# Altium PCB WEATHER_PCB.PcbDoc
Units mil, origin at the board's own origin, x right, y up, seen from the top; angles counter-clockwise.
Board outline 2746 x 1462 mil, 2 copper layers (Top Layer, Bottom Layer); 57 components, 56 nets, 190 pads, 31 vias.
Unrouted connection lines stored in the file: 12.
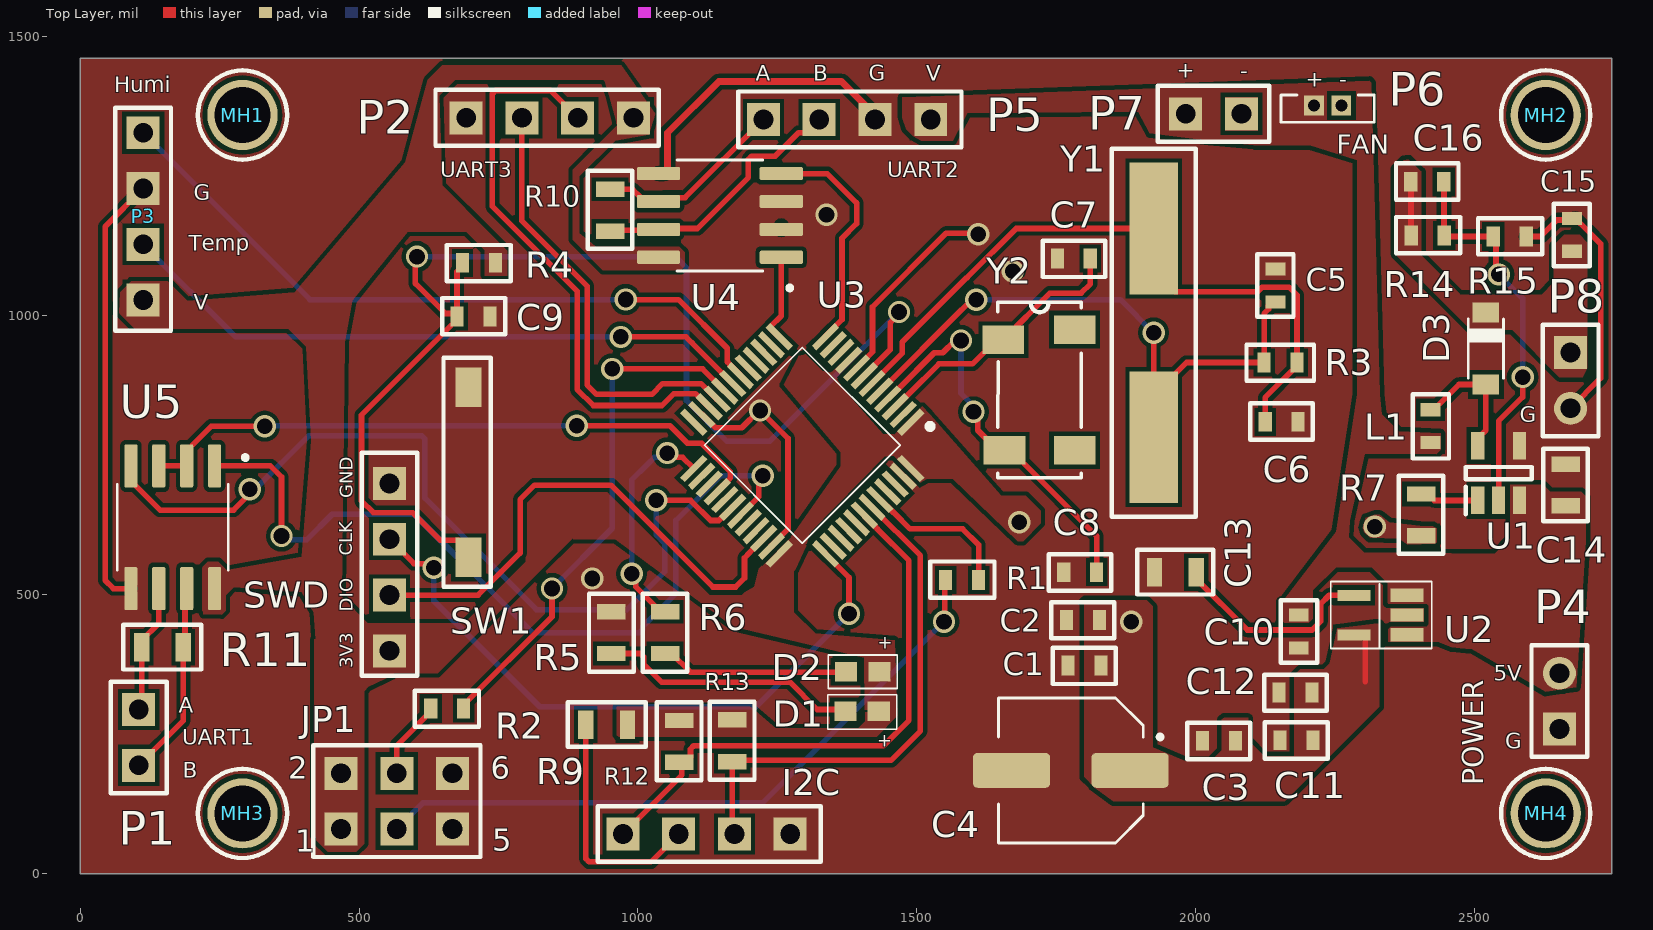
[diagram p0: Top Layer view]
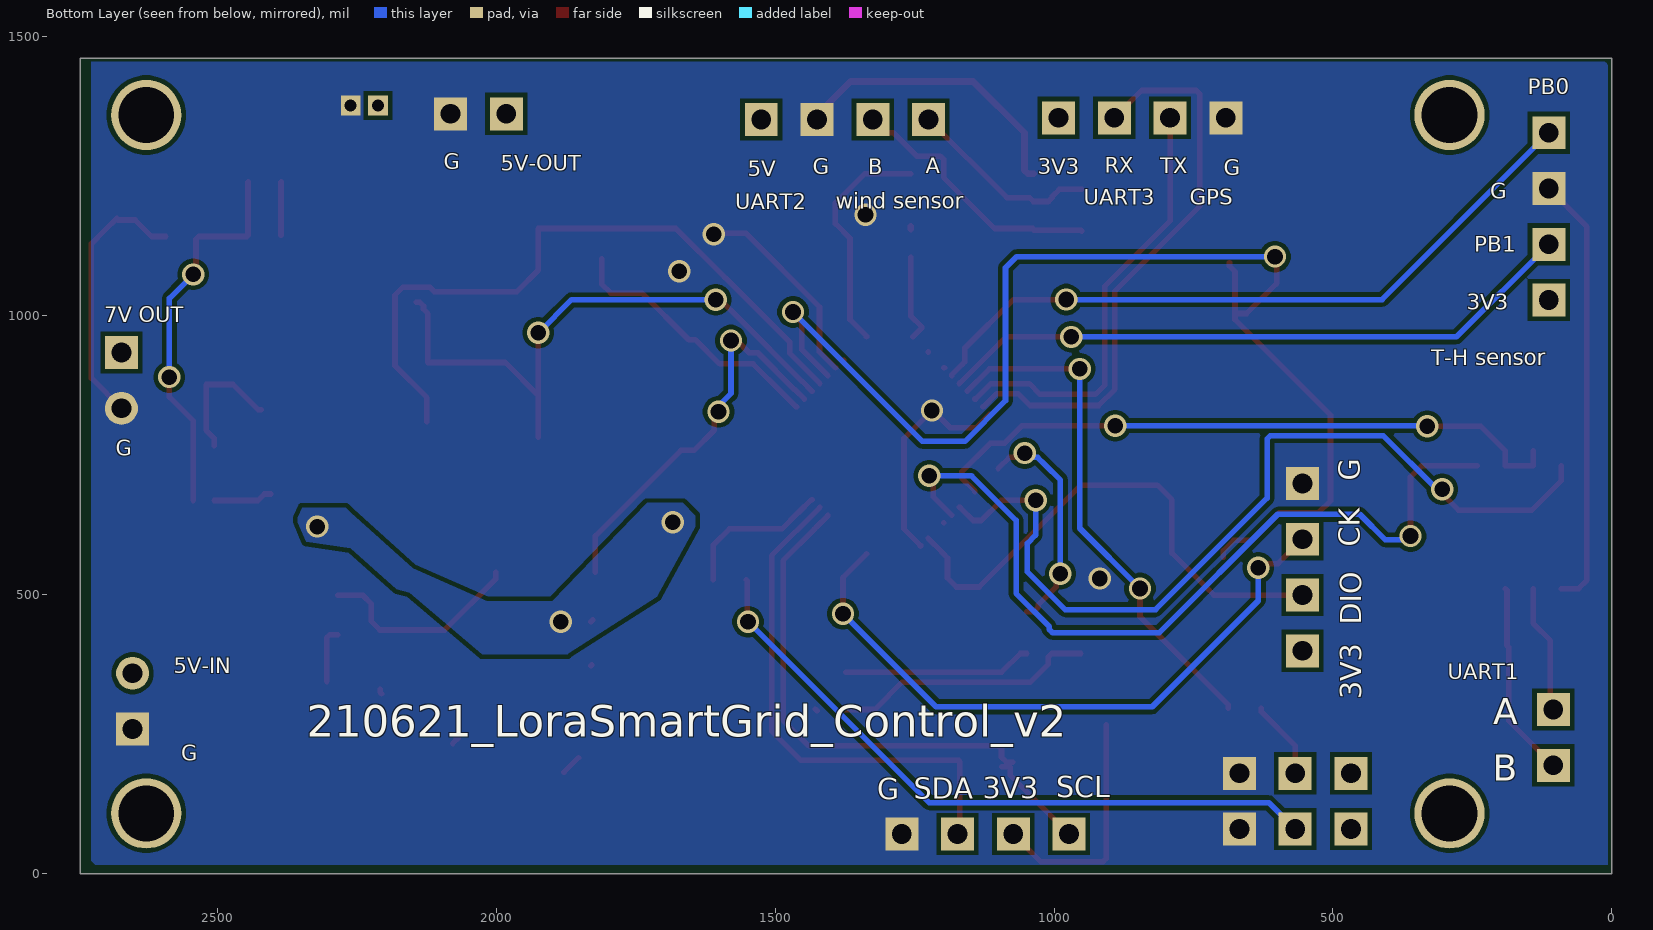
[diagram p1: Bottom Layer view, seen from below]
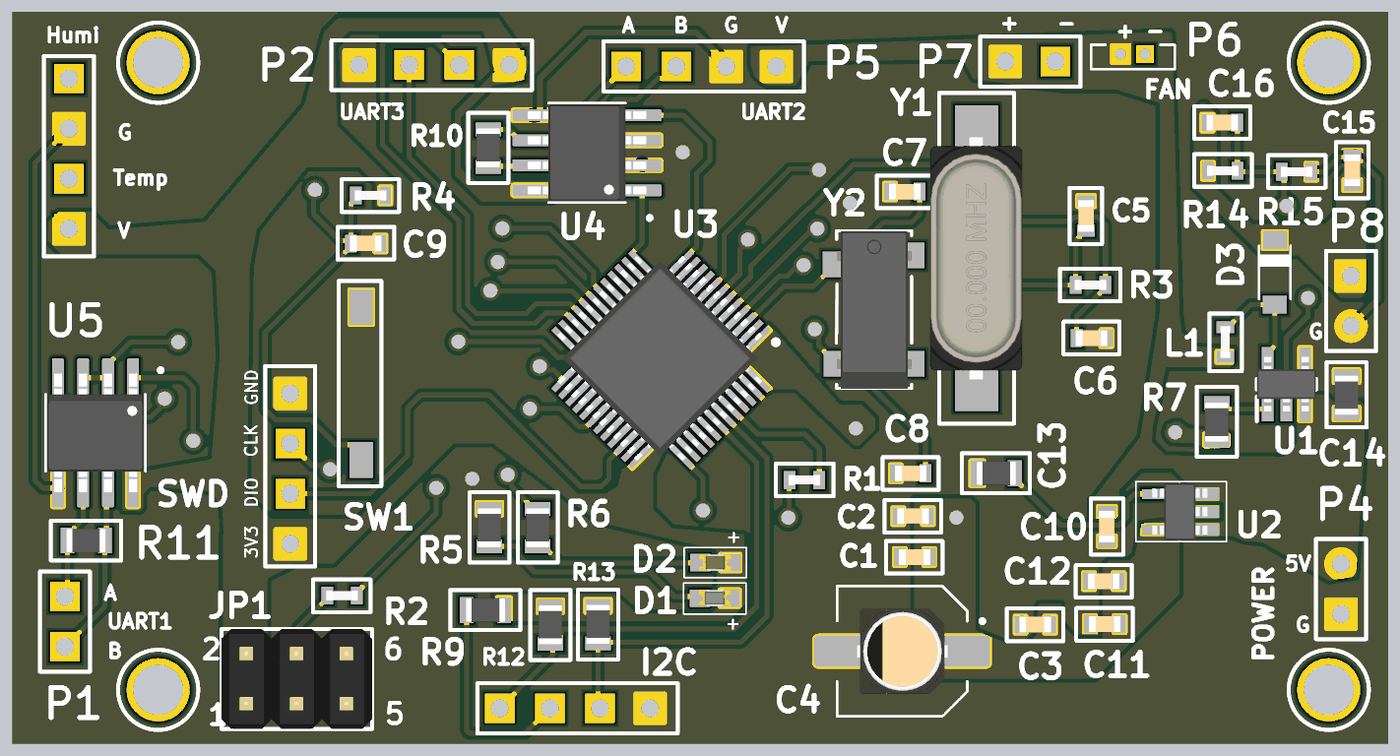
[diagram p2: 3D render of the assembled board from above, using the file's embedded part models]

## Layer stack, top to bottom
Top Solder: solder mask 0.4, Solder Resist, Dk 3.5
Top Layer: signal copper 1.4
Dielectric 1: dielectric 12.6, FR-4, Dk 4.8
Bottom Layer: signal copper 1.4
Bottom Solder: solder mask 0.4, Solder Resist, Dk 3.5

## Board outline
0.02,1461.78 2746.02,1461.78 2746.02,-0.22 0.02,-0.22

## Design rules (kind name [scope] priority, off if disabled: settings)
Clearance [All] p1: gap=7.87 ignorepadtopadclearanceinfootprint=FALSE
DiffPairsRouting [All] p1: maxlimit=10 minlimit=10 mostfreqgap=10 toplayer_minwidth=10 toplayer_maxwidth=15 toplayer_prefwidth=15 bottomlayer_minwidth=10 bottomlayer_maxwidth=15 bottomlayer_prefwidth=15 maxuncoupledlength=500
MinimumSolderMaskSliver [All] p1: minsoldermaskwidth=3.94
PlaneConnect [All] p1: planeconnectstyle=Direct reliefexpansion=20 reliefentries=4 reliefconductorwidth=10 reliefairgap=10
PolygonConnect [All] p1: connectstyle=Direct reliefconductorwidth=10 reliefentries=4 polygonreliefangle="90 Angle" airgapwidth=10
RoutingVias [All] p1: holewidth=28 width=50 viastyle="Through Hole" minholewidth=28 minwidth=50 maxholewidth=28 maxwidth=50
SilkToSolderMaskClearance [IsPad] p1: minsilkscreentomaskgap=3.94 clearancetoexposedcopper=TRUE
SolderMaskExpansion [All] p1: expansion=4 istentingtop=FALSE
Width [All] p1: maxlimit=13.78 minlimit=9.84 preferedwidth=11.81
26 further rules are at their usual default settings.

## Classes and differential pairs
differential pair RS485_2: +RS485_2_P -RS485_2_N
differential pair RS485_1: +RS485_1_P -RS485_1_N

## Components (designator, comment, footprint, x,y, rotation, side; value= is the part's Value field where it differs from the comment)
C1 "cap, 0.1u 0603" CAP0.1U_0603_CERAMIC 1800.68,372.84 r0 top
C2 "cap, 0.1u 0603" CAP0.1U_0603_CERAMIC 1797.73,454.54 r0 top
C3 "cap, 0.1u 0603" CAP0.1U_0603_CERAMIC 2041.83,238 r0 top
C4 "cap 0.1u EC" CAP0.1U_D55_EC 1776.08,184.85 r180 top
C5 "cap 22p 0603 ceramic" CAP22P_0603_CERAMIC 2143.2,1053.94 r270 top
C6 "cap 22p 0603 ceramic" CAP22P_0603_CERAMIC 2154.03,809.85 r180 top
C7 "cap 22p 0603 ceramic" CAP22P_0603_CERAMIC 1781.47,1102.49 r0 top
C8 "cap 22p 0603 ceramic" CAP22P_0603_CERAMIC 1792.81,540.17 r0 top
C9 "cap, 0.1u 0603" CAP0.1U_0603_CERAMIC 705.21,998.83 r180 top
C10 "1u, 0603, ceramic" CAP1U_0603_CERAMIC 2184.54,433.87 r90 top
C11 "cap, 0.1u 0603" CAP0.1U_0603_CERAMIC 2180.61,238.98 r0 top
C12 "1u, 0603, ceramic" CAP1U_0603_CERAMIC 2178.64,324.61 r0 top
C13 "cap 22nF, 0603" CAP22N_0603_CERAMIC 1964.07,540.17 r0 top
C14 "10u 0805 ceramic" CAP10u_0805_ceramic 2663,696 r270 top
C15 "4.7u, 0603, ceramic" CAP4.7u_0603_ceramic 2674.5,1145 r270 top
C16 "cap 12p 0603 ceramic" CAP12p_0603_ceramic 2415,1240 r180 top
D1 "led 0603 blue" LED0603_BLUE 1402.02,290.78 r180 top
D2 "LED" LED0603_GREEN 1403.02,361.78 r180 top
D3 "MBR0520LT1G" SOD3716X135N 2520,941 r270 top
I2C "I2C" HEADER4X1 1273.02,70.78 r180 top
JP1 "3x2" HDR3X2 567.78,129.64 r0 top
L1 "inductor 8.2u 0603" IND8.2u_0603 2421,802 r90 top
MH1 "NC" MH_2.2MMD_NC#1 291.02,1359.78 r0 top
MH2 "NC" MH_2.2MMD_NC#2 2627.46,1359.78 r0 top
MH3 "NC" MH_2.2MMD_NC#3 291.02,107.78 r90 top
MH4 "NC" MH_2.2MMD_NC#4 2627.46,107.78 r0 top
P1 "2x1 2.54mm" HEADER2X1 105,294 r270 top
P2 "HEADER4X1" HEADER4X1 1525,1352 r180 top
P3 "HEADER4X1" HEADER4X1 113,1028 r90 top
P4 "Header 2" HDR1X2#1 2652,259 r90 top
P5 "HEADER4X1" HEADER4X1 692.02,1354.78 r0 top
P6 "Header2x1_1.25" HEADER2X1_1.25 2211.98,1377 r180 top
P7 "Header 2" HDR1X2#2 2082,1362 r180 top
P8 "Header 2" HDR1X2#1 2672,934 r270 top
R1 "R 10k 0603" RES10K_0603 1581.2,526.39 r180 top
R2 "R 10k 0603" RES10K_0603 658,296 r0 top
R3 "resistor 10M 0603" RES10M_0603 2152.06,916.15 r0 top
R4 "R 10k 0603" RES10K_0603 715.02,1094.78 r0 top
R5 "Resistor 1k 0805" RES1K_0805 952.26,431.9 r270 top
R6 "Resistor 1k 0805" RES1K_0805 1048.72,431.9 r270 top
R7 "resistor 0R" RES_0R_0805 2404,643 r270 top
R9 "resistor 0R" RES_0R_0805 944,267 r0 top
R10 "120" RES120_0805 950.02,1189.78 r90 top
R11 "120" RES120_0805 147.02,405.78 r180 top
R12 "resistor 4.7K" RES_0R_0805 1074,237 r90 top
R13 "resistor 4.7K" RES_0R_0805 1169,238 r90 top
R14 "resistor 750K" RES750K_0603 2416,1144 r180 top
R15 "resistor 150K" RES150K_0603 2563,1142 r180 top
SW1 "NW3-A06-B3, push, tact" SW_TACT1 696.35,719.3 r90 top
SWD "SWD" HEADER4X1 554.62,699.22 r270 top
U1 "NCP1406SNT1G" SOT95P275X110-5N 2543,718 r90 top
U2 "regulator" RT9193-33 2331.2,463.39 r90 top
U3 "stm32f103c8t6" QFP50P900X900X160-48N 1294.78,767.53 r225 top
U4 "rs485 transciver SN65HVD12DR" RS485_Transciver_SN65HVD12DR 1147.02,1179.78 r180 top
U5 "rs485 transciver SN65HVD12DR" RS485_Transciver_SN65HVD12DR 166.02,620.78 r270 top
Y1 "XTAL 8M" XTAL_SMD_8M 1924.7,969.3 r90 top
Y2 "XTAL 32.768K, SMD" XTAL32.768K 1719.98,866.94 r270 top

## Footprints (in the part's own frame and the unit in brackets; to place one, negate y for a bottom-side part, rotate by r counter-clockwise, add the part's x,y. Pads: shape width x height; smd on the part's side, far side on the other; paste and mask are expansions set on the pad)
CAP0.1U_0603_CERAMIC [mm]
  rect 0.6x0.9 smd: 1(-0.75,0) 2(0.75,0)
  silkscreen extent -1.45,-0.84 1.42,0.81, body extent -0.8,-0.4 0.8,0.4, height 0.8
CAP0.1U_D55_EC [mm]
  rrect25% 3.51x1.58 smd: 1(-2.7,0) 2(2.7,0)
  silkscreen extent -4.16,-3.3 3.3,3.3, body extent -2.31,-2.14 2.29,2.16, height 5.63
CAP1U_0603_CERAMIC [mm]
  rect 0.6x0.9 smd: 1(-0.75,0) 2(0.75,0)
  silkscreen extent -1.42,-0.84 1.42,0.81, body extent -0.8,-0.4 0.8,0.4, height 0.8
CAP4.7u_0603_ceramic [mm]
  rect 0.6x0.9 smd: 1(-0.75,0) 2(0.75,0)
  silkscreen extent -1.42,-0.84 1.42,0.81, body extent -0.8,-0.4 0.8,0.4, height 0.8
CAP10u_0805_ceramic [mm]
  rect 0.7x1.3 smd: 1(-0.966,0) 2(0.934,0)
  silkscreen extent -1.67,-1.02 1.63,1.02, body extent -1,-0.6 1,0.6, height 0.71
CAP12p_0603_ceramic [mm]
  rect 0.6x0.9 smd: 1(-0.75,0) 2(0.75,0)
  silkscreen extent -1.42,-0.84 1.42,0.81, body extent -0.8,-0.4 0.8,0.4, height 0.8
CAP22N_0603_CERAMIC [mm]
  rect 0.7x1.3 smd: 1(-0.966,0) 2(0.934,0)
  silkscreen extent -1.75,-1.02 1.7,1.02, body extent -1,-0.6 1,0.6, height 0.71
CAP22P_0603_CERAMIC [mm]
  rect 0.6x0.9 smd: 1(-0.75,0) 2(0.75,0)
  silkscreen extent -1.42,-0.84 1.42,0.81, body extent -0.8,-0.4 0.8,0.4, height 0.8
HDR1X2#1 [mm] "Connector; Header; 2 Position"
  rect 1.5x1.5 hole 0.9: 1(0,0)
  round 1.5 hole 0.9: 2(2.54,0)
  silkscreen extent -1.27,-1.27 3.81,1.27
HDR1X2#2 [mm] "Connector; Header; 2 Position"
  rect 1.5x1.5 hole 0.9: 1(0,0) 2(2.54,0)
  silkscreen extent -1.27,-1.27 3.81,1.27
HDR3X2 [mm]
  rect 1.5x1.5 hole 0.9: 1(-2.54,-1.27) 2(-2.54,1.27) 3(0,-1.27) 4(0,1.27) 5(2.54,-1.27) 6(2.54,1.27)
  silkscreen extent -3.81,-2.54 3.81,2.54, body extent -3.81,-2.54 3.81,2.54, height 9.2
HEADER2X1 [mm]
  rect 1.5x1.5 hole 0.9: 1(0,0) 2(2.54,0)
  silkscreen extent -1.27,-1.27 3.81,1.27
HEADER2X1_1.25 [mm]
  rect 0.9x0.9 hole 0.55: 1(0,0) 2(-1.245,0)
  silkscreen extent -2.75,-0.47 1.5,0.76
HEADER4X1 [mm]
  rect 1.5x1.5 hole 0.9: 1(0,0) 2(2.54,0) 3(5.08,0) 4(7.62,0)
  silkscreen extent -1.4,-1.27 8.76,1.27
IND8.2u_0603 [mm]
  rect 0.6x0.9 smd: 1(-0.75,0) 2(0.75,0)
  silkscreen extent -1.47,-0.84 1.45,0.81, body extent -0.8,-0.26 0.8,0.25, height 0.43
LED0603_BLUE [mil]
  rect 40x35 smd: A(-29.92,0) K(29.92,0)
  silkscreen extent -62,-30 62,32, body extent -31,-16 31,16, height 24
LED0603_GREEN [mil]
  rect 40x35 smd: A(-29.92,0) K(29.92,0)
  silkscreen extent -62,-30 62,30, body extent -31,-16 31,16, height 24
MH_2.2MMD_NC#1 [mm]
  round 3.2 hole 2.54 unplated: 1(0,0)
  silkscreen extent -2.03,-2.03 2.03,2.03
MH_2.2MMD_NC#2 [mm]
  round 3.2 hole 2.54 unplated: 2(0,0)
  silkscreen extent -2.03,-2.03 2.03,2.03
MH_2.2MMD_NC#3 [mm]
  round 3.2 hole 2.54 unplated: 3(0,0)
  silkscreen extent -2.03,-2.03 2.03,2.03
MH_2.2MMD_NC#4 [mm]
  round 3.2 hole 2.54 unplated: 4(0,0)
  silkscreen extent -2.03,-2.03 2.03,2.03
QFP50P900X900X160-48N [mm]
  rect 1.475x0.3 smd: 1(-4.238,2.75) 2(-4.238,2.25) 3(-4.238,1.75) 4(-4.238,1.25) 5(-4.238,0.75) 6(-4.238,0.25) 7(-4.238,-0.25) 8(-4.238,-0.75) 9(-4.238,-1.25) 10(-4.238,-1.75) 11(-4.238,-2.25) 12(-4.238,-2.75) 25(4.238,-2.75) 26(4.238,-2.25) 27(4.238,-1.75) 28(4.238,-1.25) 29(4.238,-0.75) 30(4.238,-0.25) 31(4.238,0.25) 32(4.238,0.75) 33(4.238,1.25) 34(4.238,1.75) 35(4.238,2.25) 36(4.238,2.75)
  rect 0.3x1.475 smd: 13(-2.75,-4.238) 14(-2.25,-4.238) 15(-1.75,-4.238) 16(-1.25,-4.238) 17(-0.75,-4.238) 18(-0.25,-4.238) 19(0.25,-4.238) 20(0.75,-4.238) 21(1.25,-4.238) 22(1.75,-4.238) 23(2.25,-4.238) 24(2.75,-4.238) 37(2.75,4.238) 38(2.25,4.238) 39(1.75,4.238) 40(1.25,4.238) 41(0.75,4.238) 42(0.25,4.238) 43(-0.25,4.238) 44(-0.75,4.238) 45(-1.25,4.238) 46(-1.75,4.238) 47(-2.25,4.238) 48(-2.75,4.238)
  silkscreen extent -4.85,-3.15 3.15,3.62, body extent -4.5,-4.57 4.5,4.43, height 1.6
RES1K_0805 [mm]
  rect 0.7x1.3 smd: 1(-0.95,0) 2(0.95,0)
  silkscreen extent -1.78,-1.02 1.78,1.02, body extent -0.98,-0.6 1.02,0.6, height 0.71
RES10K_0603 [mm]
  rect 0.6x0.9 smd: 1(-0.75,0) 2(0.75,0)
  silkscreen extent -1.47,-0.84 1.45,0.81, body extent -0.8,-0.26 0.8,0.25, height 0.43
RES10M_0603 [mm]
  rect 0.6x0.9 smd: 1(-0.75,0) 2(0.75,0)
  silkscreen extent -1.55,-0.84 1.52,0.81, body extent -0.8,-0.26 0.8,0.25, height 0.43
RES120_0805 [mm]
  rect 0.7x1.3 smd: 1(-0.966,0) 2(0.934,0)
  silkscreen extent -1.78,-1.02 1.78,1.02, body extent -1,-0.6 1,0.6, height 0.71
RES150K_0603 [mm]
  rect 0.6x0.9 smd: 1(-0.75,0) 2(0.75,0)
  silkscreen extent -1.47,-0.84 1.45,0.81, body extent -0.8,-0.26 0.8,0.25, height 0.43
RES750K_0603 [mm]
  rect 0.6x0.9 smd: 1(-0.75,0) 2(0.75,0)
  silkscreen extent -1.47,-0.84 1.45,0.81, body extent -0.8,-0.26 0.8,0.25, height 0.43
RES_0R_0805 [mm]
  rect 0.7x1.3 smd: 1(-0.95,0) 2(0.95,0)
  silkscreen extent -1.78,-1.02 1.78,1.02, body extent -0.98,-0.6 1.02,0.6, height 0.71
RS485_Transciver_SN65HVD12DR [mm]
  rrect25% 1.97x0.6 smd: 1(-2.794,1.905) 2(-2.794,0.635) 3(-2.794,-0.635) 4(-2.794,-1.905) 5(2.794,-1.905) 6(2.794,-0.635) 7(2.794,0.635) 8(2.794,1.905)
  silkscreen extent -3.27,-2.52 1.95,3.4, body extent -3,-2.45 3,2.45, height 1.75
RT9193-33 [mm]
  rect 0.6x1.5 smd mask+0.025: 1(-0.9,-1.2) 2(0,-1.2)
  rect 0.63x1.5 smd mask+0.025: 3(0.9,-1.2)
  rect 0.5x1.5 smd: 4(0.9,1.2) 5(-0.9,1.2)
  silkscreen extent -1.52,-2.34 1.52,2.26, body extent -1.45,-1.37 1.45,1.42, height 1.3
SOD3716X135N [mm]
  rect 0.91x1.22 smd: A(1.635,0) C(-1.635,0)
  silkscreen extent -1.35,-0.8 1.35,0.8
SOT95P275X110-5N [mm]
  rect 1.25x0.6 smd: 1(-1.25,0.95) 2(-1.25,0) 3(-1.25,-0.95) 4(1.25,-0.95) 5(1.25,0.95)
  silkscreen extent -1.88,-1.5 0.28,1.5, body extent -1.38,-1.5 1.38,1.5, height 1.1
SW_TACT1 [mm]
  rect 1.8x1.2 smd: 1(-3.875,0) 2(3.875,0)
  silkscreen extent -5.21,-1.02 5.21,1.14, body extent -3.81,-1.65 3.81,1.78, height 2.55
XTAL32.768K [mm]
  rect 1.3x1.9 smd: 1(-2.286,-1.651) 2(2.75,-1.6) 3(2.75,1.6) 4(-2.75,1.6)
  silkscreen extent -4,-1.9 4,1.91, body extent -3.97,-1.9 4.03,1.91, height 2.54
XTAL_SMD_8M [mm]
  rect 6x2.2 smd: 1(-4.75,0) 2(4.75,0)
  silkscreen extent -8.38,-1.91 8.38,1.91, body extent -6.15,-2.32 6.15,2.38, height 4.36

## Part data
C1 C2 C3 C9 C11: library part CAP0.1u_0603_ceramic
C4: library part CAP0.1u_D55_EC
C5 C6 C7 C8: library part CAP22p_0603_ceramic
C10 C12: library part CAP1u_0603_ceramic
C13: library part CAP22n_0603_ceramic
C14: library part CAP10u_0805_ceramic
C15: library part CAP4.7u_0603_ceramic
C16: library part CAP12p_0603_ceramic
D1: library part LED0603_BLUE
D2: library part LED0603_GREEN
D3: "Diode Schottky 20V 0.5A Automotive 2-Pin SOD-123 T/R", Package=None, Availability=Unavailable, MF="ON Semiconductor", MP="MBR 0520LT1G", Price=None, SnapEDA_Link=https://www.snapeda.com/parts/MBR%200520LT1G/ON%20Semiconductor/view-part/4423193/?ref=snap
I2C SWD: library part HEADER4X1
JP1: library part HEADER3X2, "header 3x2"
L1: library part IND8.2u_0603, "10%  [Abracon LLC] AIML-0603-8R2K-T  FIXED IND 8.2UH 4MA 2.1 OHM SMD"
MH1 MH2 MH3 MH4: library part MH_2.2MMD_NC, "not copper, drill, 2.2mm"
P1: library part HEADER2X1
P4 P7 P8: "Header, 2-Pin", LatestRevisionDate=17-Jul-2002, LatestRevisionNote="Re-released for DXP Platform.", Publisher="Altium Limited"
R1 R2 R4: library part RES10K_0603
R3: library part RES10M_0603
R5 R6: library part RES1K_0805, "resistor 1k 0805"
R7 R9 R12 R13 R14 R15: library part RES_0R_0805
R10 R11: library part RES120_0805
SW1: library part SW_TACT1, "NW3-A06-B3"
U1: "Integrated Circuit", Manufacturer_Name="ON Semiconductor", Mouser Part Number=863-NCP1406SNT1G, Arrow Part Number=NCP1406SNT1G, Arrow Price/Stock=https://www.arrow.com/en/products/ncp1406snt1g/on-semiconductor, Datasheet Link=http://www.onsemi.com/pub/Collateral/NCP1406-D.PDF, Height=1.1mm, Manufacturer_Part_Number=NCP1406SNT1G, Mouser Price/Stock=https://www.mouser.co.uk/ProductDetail/ON-Semiconductor/NCP1406SNT1G?qs=%2FugrpAKHX8o%2F0x49StmZ3A%3D%3D
U2: library part RT9193-33, "RT9193-33, Regulator"
U3: "Integrated Circuit", Arrow Part Number=STM32F103C8T6, Manufacturer_Name=STMicroelectronics, Mouser Part Number=511-STM32F103C8T6, Arrow Price/Stock=https://www.arrow.com/en/products/stm32f103c8t6/stmicroelectronics, Datasheet Link=https://www.st.com/resource/en/datasheet/stm32f103c8.pdf, Height=1.6mm, Manufacturer_Part_Number=stm32f103c8t6, Mouser Price/Stock=https://www.mouser.co.uk/ProductDetail/STMicroelectronics/STM32F103C8T6/?qs=bhCVus9SdFtq6kqxsU5%2FDA%3D%3D
U4 U5: library part RS485_Transciver_SN65HVD12DR
Y1: library part XTAL8M
Y2: library part XTAL32.768K

## Via types
v1: diameter 40, hole 28, Top Layer to Bottom Layer, tented both sides, 31 vias

## Nets (pads, with @x,y where several pads share a name; then routed paths per layer and width w, separated by ;. In a path a pad name is that pad's centre, name@x,y a point inside that pad or via, vN(x,y) a via of type N, cw(c..) or ccw(c..) an arc to the next point about the centre after c; other vN are vias at no path point)
3V3: C1.2 C2.2 C3.2 C4.1 C11.2 C12.2 D1.A D2.A JP1.1 JP1.2 P3.1 P5.4 R4.2 R7.2 R9.2 R12.2 R13.2 SWD.4 U2.5 U3.1 U3.9 U3.36 U3.48 U4.8 U5.8 | length 179
  Top Layer w10: U3.9@1376.68,920.31 U3.9 ; D1.A@1424.86,291.78 D1.A@1427.81,294.73 ; C2.2 C2.2@1830.21,451.58 ; C1.2@1828.74,374.32 C1.2 ; C4.1@1852.63,207.79 C4.1@1878.53,181.9 ; C3.2@2068.48,243 2068.48,244.97 2069.39,245.87 2071.35,245.87 2071.35,239.97 C3.2@2078.17,233.16 ; C12.2@2205.71,322.15 C12.2 C12.2@2208.17,330.52 ; U2.5 2298.79,427.96 2303.64,423.12 2303.64,344.3
  other v1: 1884.35,451.58 2321,622 1683.56,629.73
BOOT0: JP1.3 R1.2 | length 1211
  Top Layer w10: v1(1548.72,451.58) 1550.19,453.06 1550.19,524.91 R1.2
  Bottom Layer w10: JP1.3 615.14,127 1224.13,127 v1(1548.72,451.58)
BOOT1: JP1.4 R2.1 | length 141.5
  Top Layer w10: JP1.4 567.78,229.4 628.47,290.09 R2.1
CEN: R7.1 U1.1 | length 106.4
  Top Layer w10: R7.1 2415.81,680.4 2427.43,668.79 U1.1
DIR: U3.28 U5.2 U5.3 | length 1177.1
  Top Layer w10: U5.3@141.02,757.75 U5.3 U5.2 191.02,757.75 235.27,802 v1(331,802) ; v1(890.14,802.91) 1057.05,802.91 1088.59,771.37 1114.24,771.37 1165.66,719.95 1165.66,709.29 1142,685.63 U3.28
  Bottom Layer w10: v1(331,802) 331.87,802.87 v1(890.14,802.91) v1(890.14,802.91)
FB: C16.1 R14.1 R15.2 U1.2 | length 698
  Top Layer w10: C16.1 2445.03,1239.5 2445.03,1144.5 R14.1 2447.53,1142 R15.2 2538.24,1137.24 2538.24,1078.76 v1(2543,1074) ; U1.2 2543,811 2586,854 v1(2586,890)
  Bottom Layer w10: v1(2543,1074) 2586,1031 v1(2586,890)
GND: C1.1 C2.1 C3.1 C4.2 C5.1 C6.1 C7.1 C8.1 C9.1 C10.1 C11.1 C12.1 C13.1 C14.1 C15.1 I2C.1 JP1.5 JP1.6 P2.2 P3.3 P4.1 P5.1 P6.2 P7.1 P8.2 R5.1 R15.1 SW1.2 SWD.1 U1.4 U2.2 U3.8 U3.23 U3.35 U3.47 U4.2 U4.3 U4.5 U5.5 | length 2580.9
  Top Layer w10: U5.5 59.62,510.78 45,525.4 45,1160 P3.3 ; U3.23 1115.44,822.87 1139.1,799.21 1186.15,799.21 1216.94,830 v1(1219,830) 1269,780 1269,617.75 1239.44,588.19 U3.35 ; U3.8 1420.53,935.04 1420.53,1015.79 1552.52,1147.78 1608.02,1147.78 v1(1610.02,1145.78) ; v1(1671.75,1079.54) v1@1682.41,1079.54 ; R15.1 2618,1142 2647.64,1171.64 2677.52,1171.64 2680.41,1174.53 2702.07,1152.86 2702.14,1152.86 2726,1129 2726,888 P8.2
  Top Layer w12: U4.5 1047.19,1254.78 1053,1260.59 1053,1328 1145,1420 1365,1420 1425,1360 P2.2 ; U4.2 U4.2@1257.02,1160.59
  other v1: 918,529 1338,1181
LX: D3.A L1.2 U1.5 | length 233.1
  Top Layer w10: L1.2 2426.91,831.53 2472.01,876.63 D3.A 2520,794.41 2505.6,780.01 U1.5
NetC13_2: C13.2 U2.4 | length 377
  Top Layer w10: C13.2 2000.84,528.35 2092.61,436.58 2208.47,436.58 2223.95,452.06 2223.95,483.35 2239.43,498.83 U2.4
NetD1_K: D1.K R5.2 | length 472.2
  Top Layer w10: R5.2 1004.39,394.5 1010.25,388.64 1010.25,375.38 1042.48,343.16 1272.3,343.16 1321.35,294.1 D1.K@1375.09,294.1
NetD2_K: D2.K R6.2 | length 338.3
  Top Layer w10: R6.2 1060.53,394.5 1093.99,361.03 D2.K@1373.13,361.03
NetI2C_3: I2C.3 R9.1 | length 429.6
  Top Layer w10: R9.1 906.6,26.86 912.46,21 1023.24,21 I2C.3
NetR1_1: R1.1 U3.44 | length 273.6
  Top Layer w10: U3.44 1434.92,670.43 1458.58,646.76 1459.03,646.76 1487.87,617.92 1582.18,617.92 1610.72,589.38 R1.1
NetR2_2: R2.2 U3.20 | length 937.4
  Top Layer w10: R2.2 687.53,301.91 846,460.38 v1(846,511) ; v1(954,904.59) 1115.95,904.59 U3.20
  Bottom Layer w10: v1(846,511) 954,619 v1(954,904.59)
NRST: C9.2 R4.1 SW1.1 U3.7 | length 2263.7
  Top Layer w10: v1(604,1106) 601,1103 601,1057.76 654.73,1004.03 670.48,1004.03 C9.2@672.73,1001.78 ; R4.1 685.49,1088.87 675.68,1079.07 C9.2 675.68,992.92 504.43,821.66 504.43,668.12 525.63,646.92 596.08,646.92 645.83,597.17 677.73,597.17 696.35,578.55 SW1.1 ; U3.7 1452.26,938.93 1452.26,987.02 1468.01,1002.76 v1(1468.01,1006.7)
  Bottom Layer w10: v1(604,1106) 1066.94,1106 1087.02,1085.92 1087.02,847.78 1160.02,774.78 1236.09,774.78 v1(1468.01,1006.7)
PA0: U3.10
PA1: U3.11
PA4: U3.14
PA5: U3.15 | length 1.3
  Top Layer w10: U3.15 U3.15@1225.52,935.51
PA6: U3.16
PA7: U3.17 | length 1.3
  Top Layer w10: U3.17@1196.41,906.39 U3.17
PA8: U3.29
PA11: U3.32 | length 0
PA12: U3.33
PA15: U3.38
PB0: P3.4 U3.18 | length 1255.5
  Top Layer w10: v1(978,1029) 1072.8,1029 1160.1,941.7 1160.1,917.41 1164.05,913.46 1183.76,893.75 U3.18
  Bottom Layer w10: P3.4@120.5,1320.5 412,1029 v1(978,1029)
PB1: P3.2 U3.19 | length 1160.2
  Top Layer w10: v1(969,962) 1086.39,962 1097.04,951.35 U3.19
  Bottom Layer w10: P3.2 279,962 v1(969,962)
PB3: U3.39
PB4: U3.40
PB5: U3.41
PB6: I2C.4 R12.1 U3.42 | length 1062.9
  Top Layer w10: I2C.4@951,92.8 I2C.4 1078.91,176.68 1078.91,190.82 1079.68,191.59 R12.1@1093.82,191.59 ; R12.1 1085.51,199.6 1094.29,208.38 1094.29,223.14 1100.15,229 1440.31,229 1485.72,274.42 1485.72,560.94 1429.46,617.2 1429.46,617.64 1425.51,621.6 1405.8,641.31 U3.42
PB7: I2C.2 R13.1 U3.43 | length 928.4
  Top Layer w10: I2C.2 1169.17,74.62 1169.17,200.43 R13.1 1171.24,202.84 1453.52,202.84 1506.39,255.72 1506.39,569.83 U3.43
PB8: U3.45
PB9: U3.46
PB12: R6.1 U3.25 | length 410.8
  Top Layer w10: v1(988.68,537.21) 996.33,529.56 996.33,513.81 1028.13,482.02 1028.13,478.08 1036.91,469.3 R6.1 ; v1(1052.65,753.75) 1060.31,746.09 1080.25,746.09 U3.25
  Bottom Layer w10: v1(988.68,537.21) 988.68,705.24 1016.31,732.87 1029.53,746.09 1045,746.09 v1(1052.65,753.75)
PB13: U3.26
PB14: U3.27
PC13: U3.2
RS485_1_N: P1.2 R11.1 U5.7 | length 352.4
  Top Layer w10: P1.2 185.05,274.05 R11.1 188.03,408.76 188.03,507.8 U5.7
RS485_1_P: P1.1 R11.2 U5.6 | length 231.7
  Top Layer w10: P1.1 110.24,299.24 R11.2 110.24,417.59 141.02,448.36 U5.6
RS485_2_N: P2.3 R10.1 U4.7 | length 490.3
  Top Layer w10: R10.1 951.53,1153.26 1035.5,1153.26 U4.7 1038.57,1156.33 1106.59,1156.33 1198,1247.74 1198,1280.32 1203.86,1286.18 1246.18,1286.18 1288.37,1328.37 1301.37,1328.37 P2.3 ; P2.3@1308.98,1354.22 P2.3@1318.37,1363.61
RS485_2_P: P2.4 R10.2 U4.6 | length 346.3
  Top Layer w10: R10.2 990.61,1226.55 1003.24,1213.92 1003.24,1211.59 1010.05,1204.78 U4.6 1043.83,1211.59 1084.59,1211.59 P2.4
SWCLK: SWD.2 U3.37 | length 1176.6
  Top Layer w10: SWD.2 598.19,555.65 626.35,555.65 v1(634,548) ; U3.37 1378.44,530.75 v1(1378.44,465.72)
  Bottom Layer w10: v1(634,548) 634,489 824,299 1211.72,299 v1(1378.44,465.72)
SWDIO: SWD.3 U3.34 | length 941.9
  Top Layer w10: SWD.3 713.48,499.22 788.83,574.57 788.83,670.22 814.92,696.31 951.61,696.31 1134.33,513.59 1175.17,513.59 1191.08,529.5 1191.08,565.95 1200.54,575.4 ; 1200.31,575.63 U3.34
UART1_RX: U3.31 U5.1 | length 1490.1
  Top Layer w10: U5.1 341.22,730.78 361,711 v1(361,605) ; U3.31 1216.35,675.18 1216.35,705.35 v1(1224,713)
  Bottom Layer w10: v1(361,605) 368,598 406,598 452,644 599,644 811.1,431.9 1002.86,431.9 1008.72,437.76 1008.72,442.72 1068,502 1068,633 1148,713 v1(1224,713)
UART1_TX: U3.30 U5.4 | length 1581.6
  Top Layer w10: U5.4 91.02,703.81 143.33,651.5 275.14,651.5 304,680.36 v1(304,689) ; v1(1033,669) 1094.36,669 1130.51,632.84 1144.9,632.84 1168.56,656.51 U3.30
  Bottom Layer w10: v1(304,689) 314,689 410,785 612.14,785 618,779.14 618,673 818,473 980.29,473 1048,540.71 1048,591.94 1033,606.94 v1(1033,669)
UART2_RX: U3.13 U4.1 | length 157.8
  Top Layer w10: U3.13 1237,978.42 1237,979.7 1257.02,999.72 U4.1
UART2_TX: U3.12 U4.4 | length 419.9
  Top Layer w10: U4.4 1339.22,1254.78 1392,1202 1392,1165 1365.88,1138.88 1365.88,993.02 1336.2,963.35 U3.12
UART3_RX: P5.3 U3.22 | length 1036.4
  Top Layer w10: P5.3 843.02,1403.78 744.86,1403.78 739,1397.92 739,1196 891,1044 891,868 920,839 1043,839 1064.45,860.45 1103.14,860.45 1126.8,836.79 U3.22
UART3_TX: P5.2 U3.21 | length 786.7
  Top Layer w10: P5.2 792.02,1169.98 908.88,1053.12 908.88,876.12 926,859 1025,859 1044.33,878.33 1113.1,878.33 1140.72,850.71 U3.21
VCC7V: C15.2 C16.2 D3.C P8.1 R14.2 | length 96.4
  Top Layer w10: C16.2 2385.97,1239.5 2385.97,1144.5 R14.2
VCCIN: C10.2 C14.2 L1.1 P2.1 P4.2 P6.1 P7.2 U1.3 U2.1 U2.3
XTALA: C5.2 R3.1 U3.5 Y1.1 | length 1113.3
  Top Layer w10: U3.5 1450.41,881.4 1450.86,881.4 1564.98,995.52 1597.81,1028.35 v1(1606.79,1028.35) ; Y1.1@1924.51,856.9 v1(1924.51,969.3) ; Y1.1 1924.7,857.09 1983.76,916.15 R3.1 2122.53,1003.75 2130.49,1011.7 2130.49,1017.61 2137.3,1024.42 C5.2
  Bottom Layer w10: v1(1606.79,1028.35) 1864.66,1028.35 1865.06,1028.75 v1(1924.51,969.3)
XTALB: C6.2 R3.2 U3.6 Y1.2 | length 1239.2
  Top Layer w10: U3.6 1473.61,932.43 1473.61,952.47 1589.49,1068.35 1590.22,1068.35 1678.17,1156.31 Y1.2 1924.7,1081.5 1963.01,1043.2 2111.24,1043.2 2119.27,1051.23 2167.13,1051.23 2181.59,1036.77 R3.2 2181.59,910.24 2124.5,853.16 C6.2
XTALC: C7.2 U3.3 Y2.1 | length 486.2
  Top Layer w10: U3.3 1462.76,836.79 1482.47,856.5 1486.42,860.45 1486.48,860.45 1539.58,913.55 1599.78,913.55 1643.17,956.94 Y2.1 1738.6,1040.56 1794.56,1040.56 1811,1057 C7.2
XTALD: C8.2 U3.4 Y2.2 | length 705
  Top Layer w10: U3.4 1464.11,867.26 1465,867.26 1531.29,933.55 1546.44,933.55 1568.4,955.52 v1(1579.23,955.52) ; v1(1601.56,827.57) 1609.21,819.91 1609.21,794.63 1645.17,758.67 1668.8,758.67 1822.34,605.13 C8.2
  Bottom Layer w10: v1(1579.23,955.52) 1579.23,860.72 1601.56,838.39 v1(1601.56,827.57)
pads on no net: MH1.1 MH2.2 MH3.3 MH4.4 U3.24 Y2.3 Y2.4

## Polygon pours and split planes (outlines as drawn)
GND on Bottom Layer "GND_L02_P113" (solid, pour order 113): 7,1453 9,1455 2726,1455 2726,23 2719,16 7,16 7,1451 9,1453
3V3 on Bottom Layer "Bottom Layer-3V3" (solid, pour order 112): 2155.45,503 2178.5,509.5 2261,583 2341,595 2356,630 2356,632 2356,634 2356,637.74 2348,656 2270,656 2261,647 2150,547 2016.05,488 1899.56,488 1729.72,664.28 1665.52,664.28 1643.02,641.78 1643.02,621.78 1712.02,495.78 1872.02,393.78 1872.02,392.78 1914.02,392.78 2025.34,392.78
GND on Top Layer "GND_L01_P126" (solid, pour order 126): 0.02,1461.78 2746.02,1461.78 2746.02,-0.22 0.02,-0.22
3V3 on Top Layer "3V3_L01_P124" (solid, pour order 124): 2299.57,620.3 2302.5,611.5 2312.44,601.56 2365,600 2380,589 2429,591 2430.5,592.5 2432,594 2432,595 2432,619 2425,623 2410,623 2347,630 2330,643 2320,643 2305.05,637.66
VCC7V on Top Layer "VCC7V_L01_P122" (solid, pour order 122): 2373,1279 2358,1264 2358,1110 2493,975 2567,975 2652,890 2694,890 2702,906 2702,914 2702,1131 2688,1145 2661,1145 2642,1126 2642,1060 2620,1038 2473,1038 2473,1039 2404,1108 2404,1259 2403,1259 2382,1280 2372,1280
VCCIN on Top Layer "Top Layer-VCCIN" (solid, pour order 121): 1918,1327 2023,1313.78 2104,1306 2204.23,1306 2289.86,1279 2289.86,859.06 2251.47,613 2156.87,488.87 2152.54,488.87 2152.54,456.02 2163.87,444.69 2204.23,444.69 2210.13,450.6 2210.13,507.68 2251.47,549.02 2315.45,549.02 2343.99,520.48 2343.99,485.05 2344.98,484.06 2413.87,484.06 2417.81,480.13 2417.81,446.66 2413.87,442.72 2349.9,442.72 2344.98,437.8 2344.98,415.17 2433.82,415.17 2459.11,405.36 2473.77,404.01 2484.41,403.02 2495.98,401.96 2627.06,326 2681.83,334 2699,596.02 2699,676 2691,684 2635.63,684 2622.63,697 2564,697 2564,601 2536.37,573.37 2301.14,575.86 2274.28,602.72 2276.1,632.56 2302.87,752.13 2431,752 2439,760 2439,789 2363.86,793.14 2333.77,823.23 2329.72,859.06 2314.76,1421.45 1474.04,1391.8 1474.04,1355 1481,1334 1493.5,1321.5 1508,1313.78 1564,1313.78 1590.15,1362.9 1897,1365.83
3V3 on Top Layer "3V3_L01_P004" (solid, remove dead copper, pour order 4): 1797.73,486.54 1799.7,484.57 1799.7,257.69 1799.7,173.04 1818.89,153.85 1851.87,129.73 2159.94,129.73 2329.23,299.02 2329.23,447.65 2319.39,447.65 2253.93,439.28 2240.65,376.78 2229.82,365.95 2187.5,365.95 2176.67,355.13 2176.67,210.44 2122.54,210.44 2093.99,238.98 2093.99,279.34 2050.69,279.34 2048.72,281.31 2046.75,279.34 2046.75,221.27 2027.06,201.58 1982.13,201.58 1922.73,226.21 1922.73,479.14 1911.91,489.97 1801.17,489.97
3V3 on Top Layer "Top Layer-3V3" (solid, pour order 106): 167 vertices, not listed, extent 70,39 1722.41,1448.78

## Silkscreen, mask and mechanical layers (free items; w line width, h text height)
Top Overlay:
  text "+" at 1966,1426.29 h28.24
  text "-" at 2080,1425.88 h28.24
  text "A" at 1211,1421 h28.24
  text "B" at 1314,1421 h28.24
  text "G" at 1414,1421 h28.24
  text "V" at 1517,1421 h28.24
  text "-" at 2257,1410.88 h28.24
  text "+" at 2197,1410.29 h28.24
  text "Humi" at 61,1401 h28.24
  text "FAN" at 2253,1290 h34.24
  text "UART3" at 646,1248 h28.24
  text "UART2" at 1447,1248 h28.24
  text "G" at 204,1207 h28.24
  text "Temp" at 195,1116.41 h28.24
  text "V" at 204,1011 h28.24
  text "G" at 2581,809 h28.24
  text "GND" at 488.68,673.04 h23.62 r90
  text "CLK" at 487.69,569.69 h23.62 r90
  text "DIO" at 488.68,469.3 h23.62 r90
  text "+" at 1457.08,402.78 h23.62
  text "3V3" at 488.68,367.92 h23.62 r90
  text "5V" at 2534,346 h28.24
  text "A" at 177,288 h28.24
  text "UART1" at 183,231 h28.24
  text "G" at 2555,224 h28.24
  text "B" at 184,172 h28.24
  text "POWER" at 2515,158 h37.24 r90
Bottom Overlay:
  text "PB0" at 151,1397 h28.24
  text "G" at 2094,1263 h27.24
  text "5V-OUT" at 1992,1260 h27.24
  text "RX" at 909,1256 h27.24
  text "TX" at 810,1255 h27.24
  text "A" at 1230,1255 h27.24
  text "3V3" at 1029,1254 h28.24
  text "B" at 1333,1254 h27.24
  text "G" at 1433,1254 h28.24
  text "G" at 696,1252 h28.24
  text "5V" at 1549,1250 h28.24
  text "G" at 218,1210 h28.24
  text "GPS" at 757,1199 h28.24
  text "UART3" at 947,1199 h27.24
  text "wind sensor" at 1391,1192 h28.24
  text "UART2" at 1572,1191 h27.24
  text "PB1" at 247,1115 h28.24
  text "3V3" at 260,1011 h28.24
  text "7V OUT" at 2703,988 h27.24
  text "T-H sensor" at 324,911 h28.24
  text "G" at 2682,749 h27.24
  text "G" at 452.42,703.71 h37.24 r270
  text "CK" at 452.42,585.6 h37.24 r270
  text "DIO" at 449.46,445.83 h37.24 r270
  text "5V-IN" at 2578,359 h27.24
  text "UART1" at 294,348 h27.24
  text "3V3" at 449.46,311.98 h37.24 r270
  text "A" at 213,268 h47.24
  text "210621_LoraSmartGrid_Control_v2" at 2340,245.54 h57.24
  text "G" at 2565,202 h27.24
  text "B" at 214,166 h47.24
  text "SCL" at 996,137 h37.24
  text "3V3" at 1128,135 h37.24
  text "SDA" at 1252,134 h37.24
  text "G" at 1317,133 h37.24
Mechanical Drawing:
  lines w27.87: 1,0.78 407.02,0.78 2733.02,0.78 2735.02,2.78 2735.02,1446.78 2735.02,1458 1,1458 1,406.8 1,0.78
Board Outline:
  lines w11.81: 0,-2 0,397 0,1462 2745,1462 2745,1442 2745,0 2743,-2 399,-2 0,-2

## Text inside footprints (layer, text, board x,y; h text height)
D1: Top Overlay "+" at 1455.53,248.16 h23.62 r180
JP1: Top ASM TOP/ASM BOTTOM "1" at 382.78,59.64 h50; Top ASM TOP/ASM BOTTOM "2" at 367.78,159.64 h50; Top ASM TOP/ASM BOTTOM "5" at 737.78,59.64 h50; Top ASM TOP/ASM BOTTOM "6" at 732.78,159.64 h50; Top Overlay "1" at 386,39 h40; Top Overlay "2" at 373,170 h40; Top Overlay "5" at 739,41 h40; Top Overlay "6" at 736,170 h40